# Altium PCB PCB1.PcbDoc
Units mm, origin at the board's own origin, x right, y up, seen from the top; angles counter-clockwise.
Board outline 60 x 30 mm, 2 copper layers (Top Layer, Bottom Layer); 16 components, 10 nets, 38 pads, 0 vias.
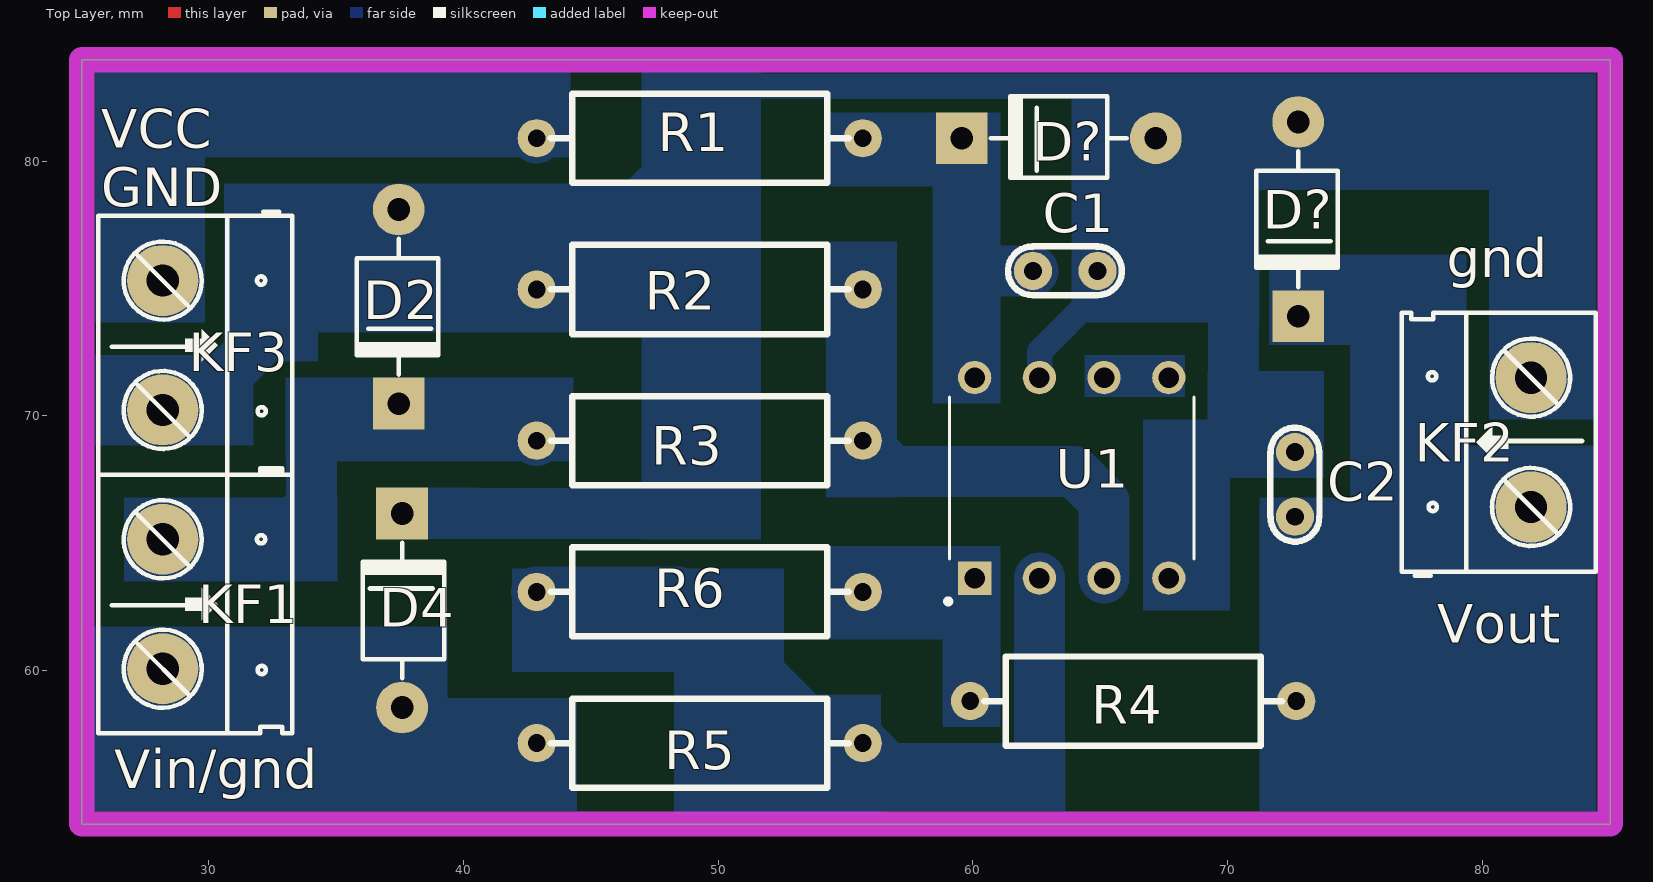
[diagram p0: Top Layer view]
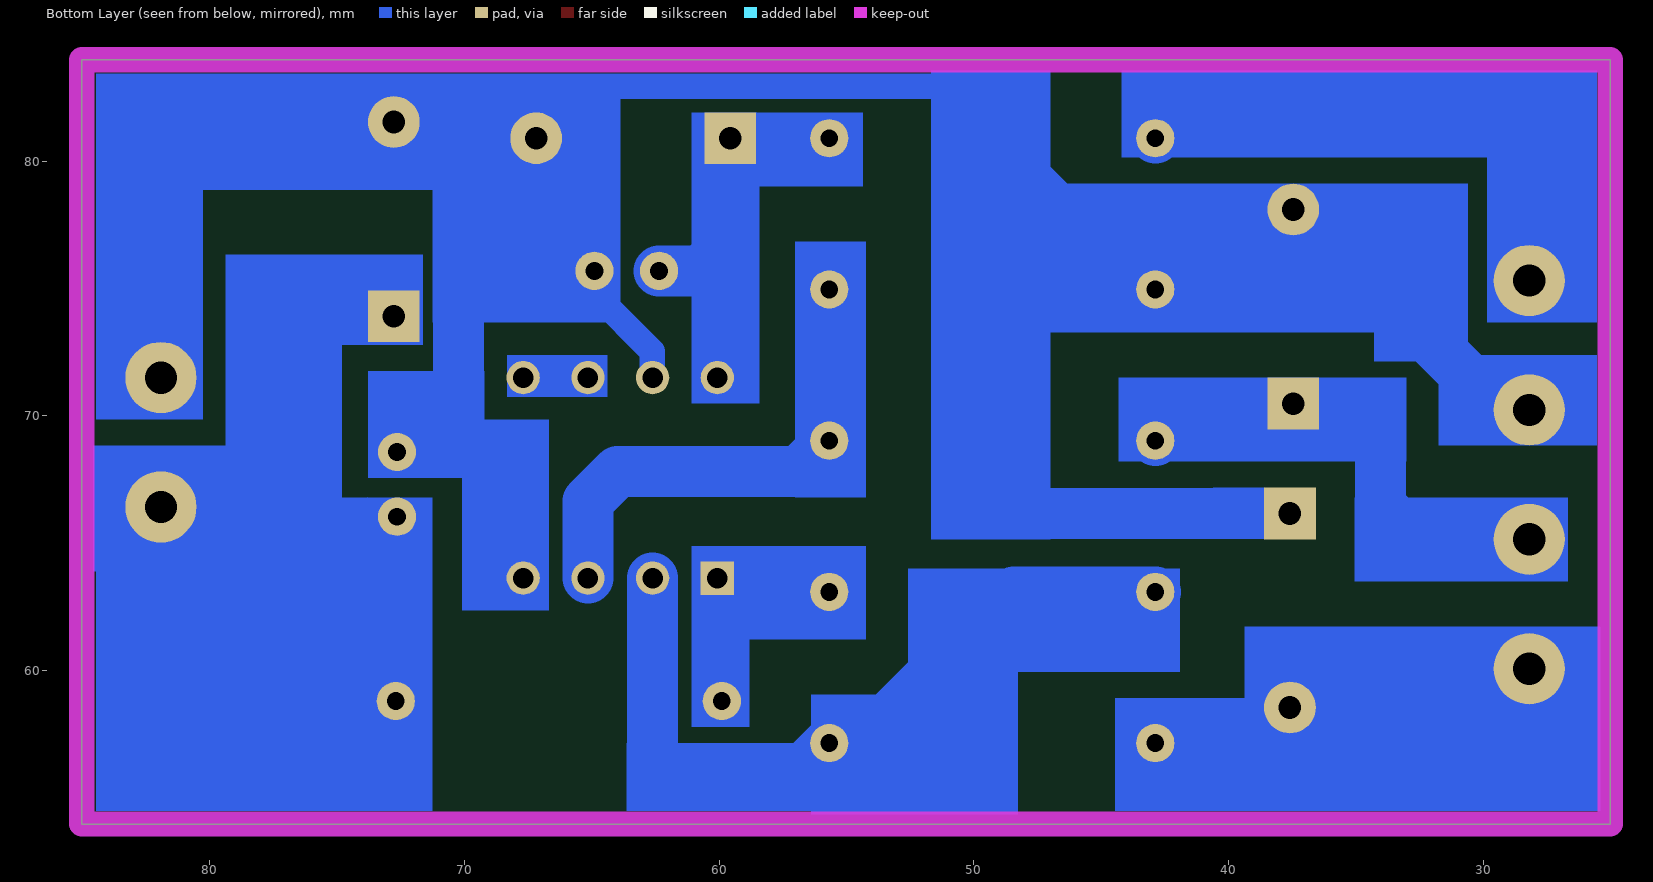
[diagram p1: Bottom Layer view, seen from below]
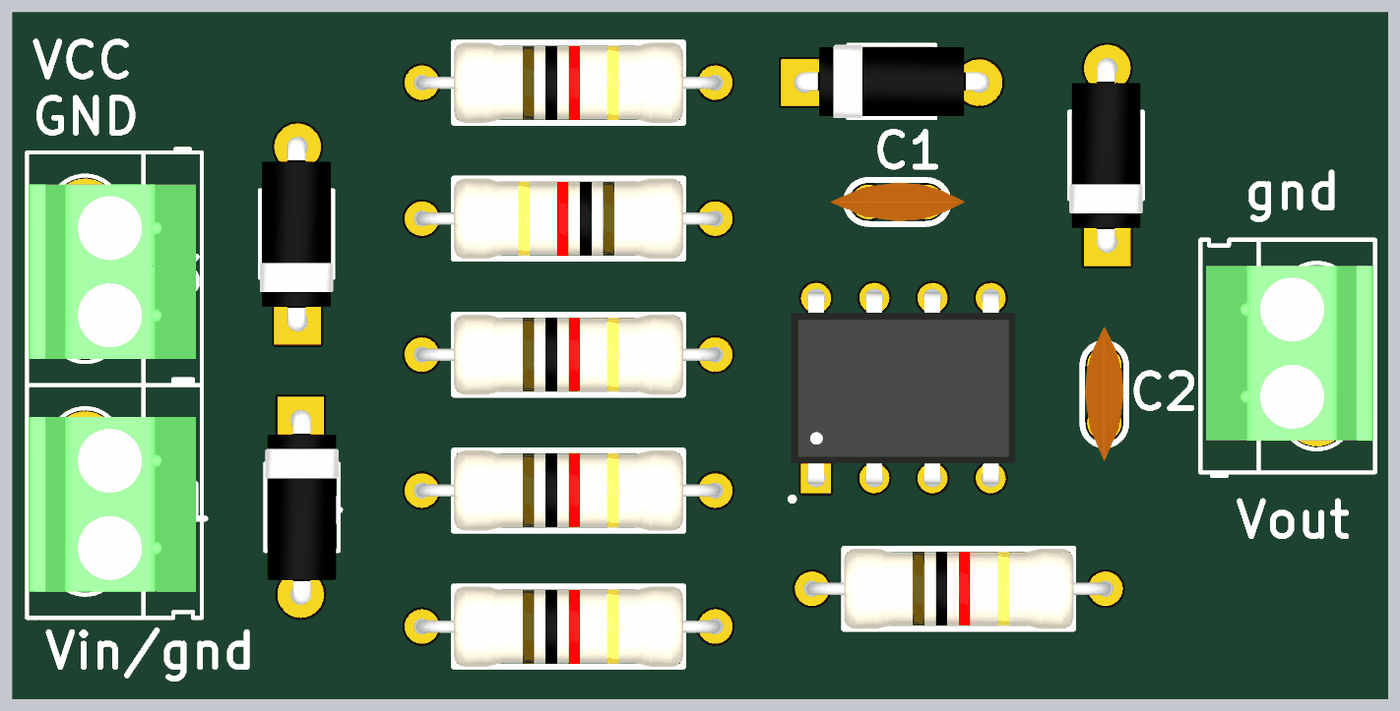
[diagram p2: 3D render of the assembled board from above, using the file's embedded part models]

## Layer stack, top to bottom
Top Solder: solder mask 0.0102, Solder Resist, Dk 3.5
Top Layer: signal copper 0.0356
Dielectric 1: dielectric 0.32, FR-4, Dk 4.8
Bottom Layer: signal copper 0.0356
Bottom Solder: solder mask 0.0102, Solder Resist, Dk 3.5

## Board outline
25.019,53.975 25.019,83.975 85.019,83.975 85.019,53.975

## Design rules (kind name [scope] priority, off if disabled: settings)
Clearance [All] p1: gap=0 ignorepadtopadclearanceinfootprint=FALSE
PlaneClearance [All] p1: clearance=5
PlaneConnect [All] p1: planeconnectstyle=Direct reliefexpansion=0.508 reliefentries=4 reliefconductorwidth=0.254 reliefairgap=0.254
PolygonConnect [All] p1: connectstyle=Direct reliefconductorwidth=0.254 reliefentries=4 polygonreliefangle="90 Angle" airgapwidth=0.254
RoutingVias [All] p1: holewidth=0.711 width=1.27 viastyle="Through Hole" minholewidth=0.711 minwidth=1.27 maxholewidth=0.711 maxwidth=1.27
SolderMaskExpansion [All] p1: expansion=0.102 istentingtop=FALSE
Width [All] p1: maxlimit=2 minlimit=0.5 preferedwidth=1 minimp=50.000000 maximp=50.000000 favimp=50.000000
28 further rules are at their usual default settings.

## Classes and differential pairs
component class Sheet1: C1 C2 D2 D4 D? KF1 KF2 KF3 R1 R2 R3 R4 R5 R6 U1

## Components (designator, comment, footprint, x,y, rotation, side; value= is the part's Value field where it differs from the comment)
C1 "1u" "tu gom" 63.627,75.692 r0 top
C2 "100nF" "tu gom" 72.644,67.31 r90 top
D2 "P6KE36CA" "DIODE 1A" 37.459,79.369 r90 top
D4 "P6KE36CA" "DIODE 1A" 37.592,57.277 r270 top
D? "3.3v" "DIODE 1A" 72.771,82.804 r90 top
D? "5v" "DIODE 1A" 68.453,80.899 r0 top
KF1 "CON 2 KF301" "Con 2 KF301 5.08" 28.194,65.151 r270 top
KF2 "CON 2 KF301" "Con 2 KF301 5.08" 81.915,66.421 r90 top
KF3 "CON 2 KF301" "Con 2 KF301 5.08" 28.194,75.311 r270 top
R1 "470R" "tro vach 1/2w" 49.276,80.899 r0 top
R2 "8.2k" "tro vach 1/2w" 49.276,74.962 r180 top
R3 "33k" "tro vach 1/2w" 49.276,69.024 r0 top
R4 "1k" "tro vach 1/2w" 66.294,58.801 r0 top
R5 "33k" "tro vach 1/2w" 49.276,57.15 r0 top
R6 "8.2k" "tro vach 1/2w" 49.276,63.087 r0 top
U1 "MCP6002-I/P" DIP787W46P254L927H533Q8 63.881,67.564 r90 top

## Footprints (in the part's own frame and the unit in brackets; to place one, negate y for a bottom-side part, rotate by r counter-clockwise, add the part's x,y. Pads: shape width x height; smd on the part's side, far side on the other; paste and mask are expansions set on the pad)
"Con 2 KF301 5.08" [mil]
  round 110 hole 50: 1(0,0) 2(200,0)
  silkscreen extent -106,-100 300,200, body extent -45,-97 255,190, height 335
"DIODE 1A" [mil] "Diode 1A"
  round 80 hole 35: 1(-50,0)
  rect 80x80 hole 35: 2(-350,0)
  silkscreen extent -305,-61 -95,65, body extent -366,-61 -34,65, height 122
DIP787W46P254L927H533Q8 [mm]
  rect 1.308x1.308 / inner round 1.308 / far side rect 1.308x1.308 hole 0.8: 1(-3.935,3.81)
  round 1.308 hole 0.8: 2(-3.935,1.27) 3(-3.935,-1.27) 4(-3.935,-3.81) 5(3.935,-3.81) 6(3.935,-1.27) 7(3.935,1.27) 8(3.935,3.81)
  silkscreen extent -4.95,-4.8 3.18,4.95, body extent -4.19,-4.89 4.19,4.89, height 4.32
"tro vach 1/2w" [mm]
  round 1.5 hole 0.7: 1(-6.4,0) 2(6.4,0)
  silkscreen extent -5.84,-1.75 5.84,1.75, body extent -6.62,-1.75 6.62,1.75, height 3.5
"tu gom" [mm] "Tu gom mini"
  round 1.5 hole 0.7: 1(-1.27,0) 2(1.27,0)
  silkscreen extent -2.25,-0.97 2.22,0.97, body extent -2.92,-0.85 2.92,0.85, height 6.12

## Part data
C1 C2: library part "Tu gom 15pF 50V", "Cắm", Chung_Loai=Cắm, Don_Vi=Con, Ma_Hang=MH004767, So_Chan=2, Ten_Linh_Kien="Tụ gốm 15P 50V"
D2 D4: library part "Diode P6KE36CA", "TVS Diodes P6KE36CA 600W 36V DO-15 (DO-204AC)"
D? D?: library part "Diode 1N4007", "Cắm", Chung_Loai=Cắm, Don_Vi=Con, Ma_Hang=MH001063, Ten_Linh_Kien="Diode 1N4007 1A (DIP)"
KF1 KF2 KF3: "Cắm", Chung_Loai=Cắm, Don_Vi=Con, Ma_Hang=MH000987, Ten_Linh_Kien="CON 2 KF301-2P 5.08MM Xanh Dương"
R1 R2 R3 R4 R5 R6: library part "Tro Vach 1/2W 5% 0.22R", "Cắm", Chung_Loai=Cắm, Don_Vi=Con, Ma_Hang=MH006031, So_Chan=2, Ten_Linh_Kien="Trở 5% 1/2w 0.22R"
U1: "Microchip ,Dual Op Amp,1MHz CMOS,Rail to Rail,3V,5V,8-Pin PDIP", Package="DIP-8 Microchip", Check_prices=https://www.snapeda.com/parts/MCP6002-I/P/Microchip+Technology/view-part/?ref=eda, MF=Microchip, MP=MCP6002-I/P, SnapEDA_Link=https://www.snapeda.com/parts/MCP6002-I/P/Microchip+Technology/view-part/?ref=snap

## Nets (pads, with @x,y where several pads share a name; then routed paths per layer and width w, separated by ;. In a path a pad name is that pad's centre, name@x,y a point inside that pad or via, vN(x,y) a via of type N, cw(c..) or ccw(c..) an arc to the next point about the centre after c; other vN are vias at no path point)
GND: C1.2 C2.2 D2.1 D4.2 D?.1 KF2.2 KF3.2 R2.2 U1.4 U1.7 | length 130.5
  Bottom Layer w1: R2.2 50.845,82.931 65.405,82.931 67.183,81.153 D?.1@67.183,80.899 ; U1.7 62.625,71.513 62.625,72.531 64.801,74.707 64.801,75.596 C1.2
  Bottom Layer w2: KF3.2 28.346,70.383 29.489,70.383 37.199,78.093 37.453,78.093 D2.1 37.465,78.105 40.005,78.105 42.876,75.234 R2.2 47.85,74.962 49.022,73.79 49.022,67.339 47.85,66.167 D4.2 ; U1.4 67.691,67.408 68.863,68.58 C2.2 70.231,70.993 70.231,74.139 69.059,75.311 65.278,75.311 C1.2 64.897,78.867 66.923,80.893 67.177,80.893 67.183,80.899 67.192,80.899 67.827,81.534 72.771,81.534 80.743,81.534 81.915,80.362 KF2.2
NetC2_1: C2.1 D?.2@72.771,73.914 KF2.1 R4.2 | length 30.6
  Bottom Layer w1: C2.1 72.779,66.04 73.033,66.294 75.438,66.294 ; 72.694,57.15 74.852,57.15 75.438,57.736 75.438,66.421 ; D?.2@72.771,73.914 73.022,73.663 74.673,73.663 75.438,72.898 75.438,66.421 ; KF2.1 75.438,66.421
NetD2_2: D2.2 KF1.1 R3.1 | length 19.1
  Bottom Layer w2: KF1.1 28.346,65.303 32.864,65.303 34.036,66.474 34.036,69.291 35.208,70.463 37.443,70.463 37.465,70.485 41.415,70.485 R3.1
NetD4_1: D4.1 KF1.2 R5.1 | length 15.9
  Bottom Layer w2: KF1.2 28.239,60.071 29.763,58.547 D4.1 38.989,57.15 R5.1
NetR2_1: R2.1 R3.2 U1.3 | length 19.4
  Bottom Layer w2: R2.1 R3.2 56.882,67.818 63.979,67.818 65.151,66.646 U1.3
NetR4_1: R4.1 R6.2 U1.1 | length 5.1
  Bottom Layer w2: R6.2 56.218,63.629 U1.1 U1.1@59.817,63.375 ; R4.1@59.817,58.878 R4.1
NetR5_2: R5.2 R6.1 U1.2 | length 30.6
  Bottom Layer w2: R6.1 48.419,63.087 54.356,57.15 R5.2 57.2,55.626 62.23,55.626 62.611,56.007 U1.2
NetU1_5: U1.5 U1.6 | length 2.5
  Bottom Layer w1: U1.6 U1.5
VCC: KF3.1 R1.1 | length 20.8
  Bottom Layer w2: KF3.1 28.346,75.463 28.346,80.616 29.517,81.788 41.987,81.788 R1.1
VDD: C1.1 D?.2@59.563,80.899 R1.2 U1.8 | length 19.5
  Bottom Layer w2: R1.2 D?.2@59.563,80.899 ; 59.563,76.864 60.735,75.692 ; 59.753,76.263 59.753,80.835 59.968,75.824 60.087,75.824 60.198,75.692 C1.1 ; U1.8 60.071,73.406

## Keep-outs
Keep-Out Layer:
  the board outline again, w1

## Other copper
Bottom Layer:
  rectangle net GND: 30.607,72.136 34.29,79.121
  rectangle net GND: 25.527,68.834 31.75,72.39
  rectangle net GND: 69.215,67.564 73.787,71.755
  rectangle net GND: 66.675,67.564 73.787,69.85
  rectangle net GND: 66.675,62.357 70.104,69.596
  rectangle net NetR5_2: 55.88,54.483 63.627,57.15
  rectangle net NetR5_2: 48.26,54.356 56.388,59.055
  rectangle net NetR5_2: 48.26,54.356 52.578,64.008
  rectangle net NetR5_2: 41.91,59.944 51.816,64.008
  rectangle net GND: 80.264,69.85 84.455,83.439
  rectangle net GND: 70.866,78.867 84.455,83.439
  rectangle net GND: 63.881,73.66 71.247,83.439
  rectangle net GND: 46.99,65.151 51.689,83.566
  rectangle net GND: 33.274,73.279 49.911,79.121
  rectangle net NetD4_1: 36.449,54.483 44.45,58.928
  rectangle net NetU1_5: 64.389,70.739 68.326,72.39
  rectangle net NetD2_2: 33.02,68.199 44.323,71.501
  rectangle net NetD2_2: 26.67,63.5 35.052,66.802
  rectangle net NetD4_1: 25.4,54.483 39.37,61.722
  rectangle net VDD: 54.356,78.994 61.087,81.915
  rectangle net VDD: 58.42,70.485 61.087,81.915
  rectangle net NetR2_1: 54.229,66.802 57.023,76.835
  rectangle net NetR4_1: 58.801,57.785 61.087,61.976
  rectangle net NetR4_1: 54.229,61.214 61.087,64.897
  rectangle net NetC2_1: 74.803,65.278 79.375,74.93
  rectangle net NetC2_1: 71.628,72.771 79.375,76.327
  rectangle net NetC2_1: 77.724,63.881 84.582,68.834
  rectangle net NetC2_1: 71.247,54.483 84.455,66.802
  rectangle net GND: 35.687,76.2 40.894,79.121
  rectangle net VCC: 26.543,80.137 44.196,83.566
  rectangle net VCC: 25.527,73.66 29.845,83.566

## Silkscreen, mask and mechanical layers (free items; w line width, h text height)
Top Overlay:
  text "VCC  / GND" at 25.781,78.232 h1.52
  text "gnd" at 78.613,75.438 h1.52
  text "Vout" at 78.232,61.087 h1.52
  text "Vin/gnd" at 26.289,55.372 h1.52